# Altium PCB SOUL_EEG_PCB_Rev1.PcbDoc (part 1 of 2)
Units mil, origin at the board's own origin, x right, y up, seen from the top; angles counter-clockwise.
Board outline 3125 x 4300 mil, 4 copper layers (Top Layer, Upper Signal Layer, Lower Signal Layer, Bottom Layer), stack 30.635 mil thick; 183 components, 219 nets, 853 pads, 303 vias.
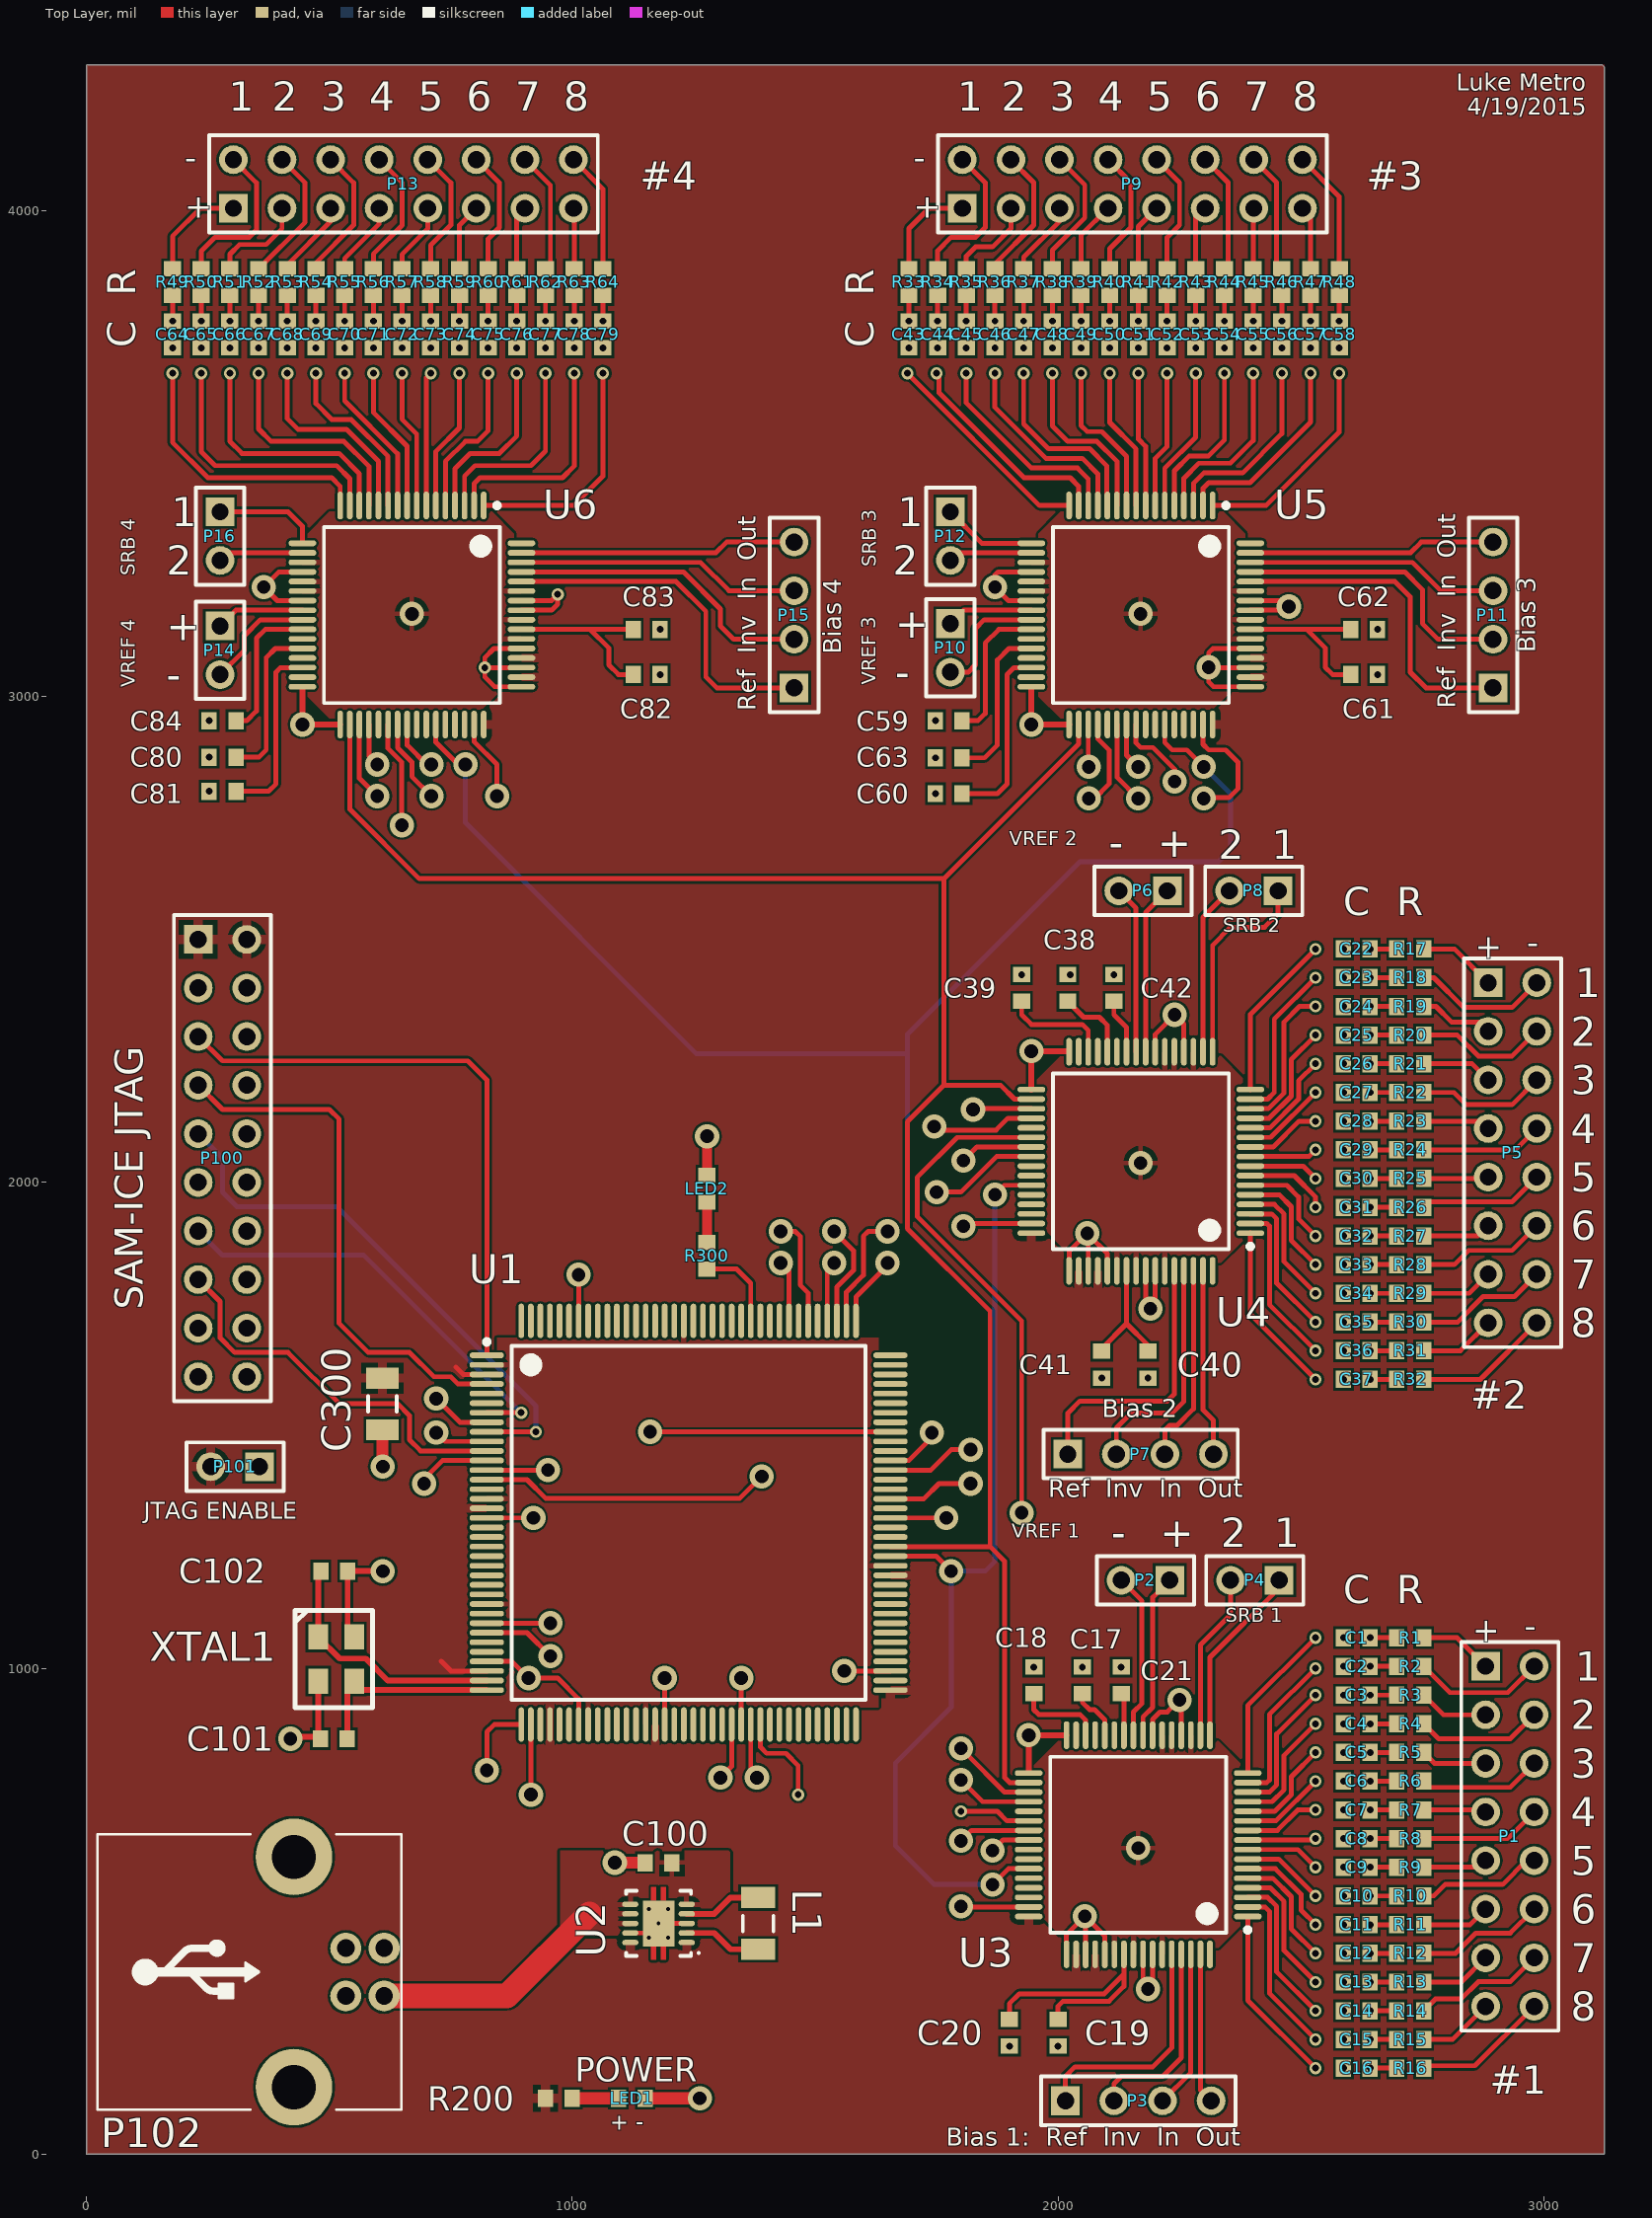
[diagram p0: Top Layer view]
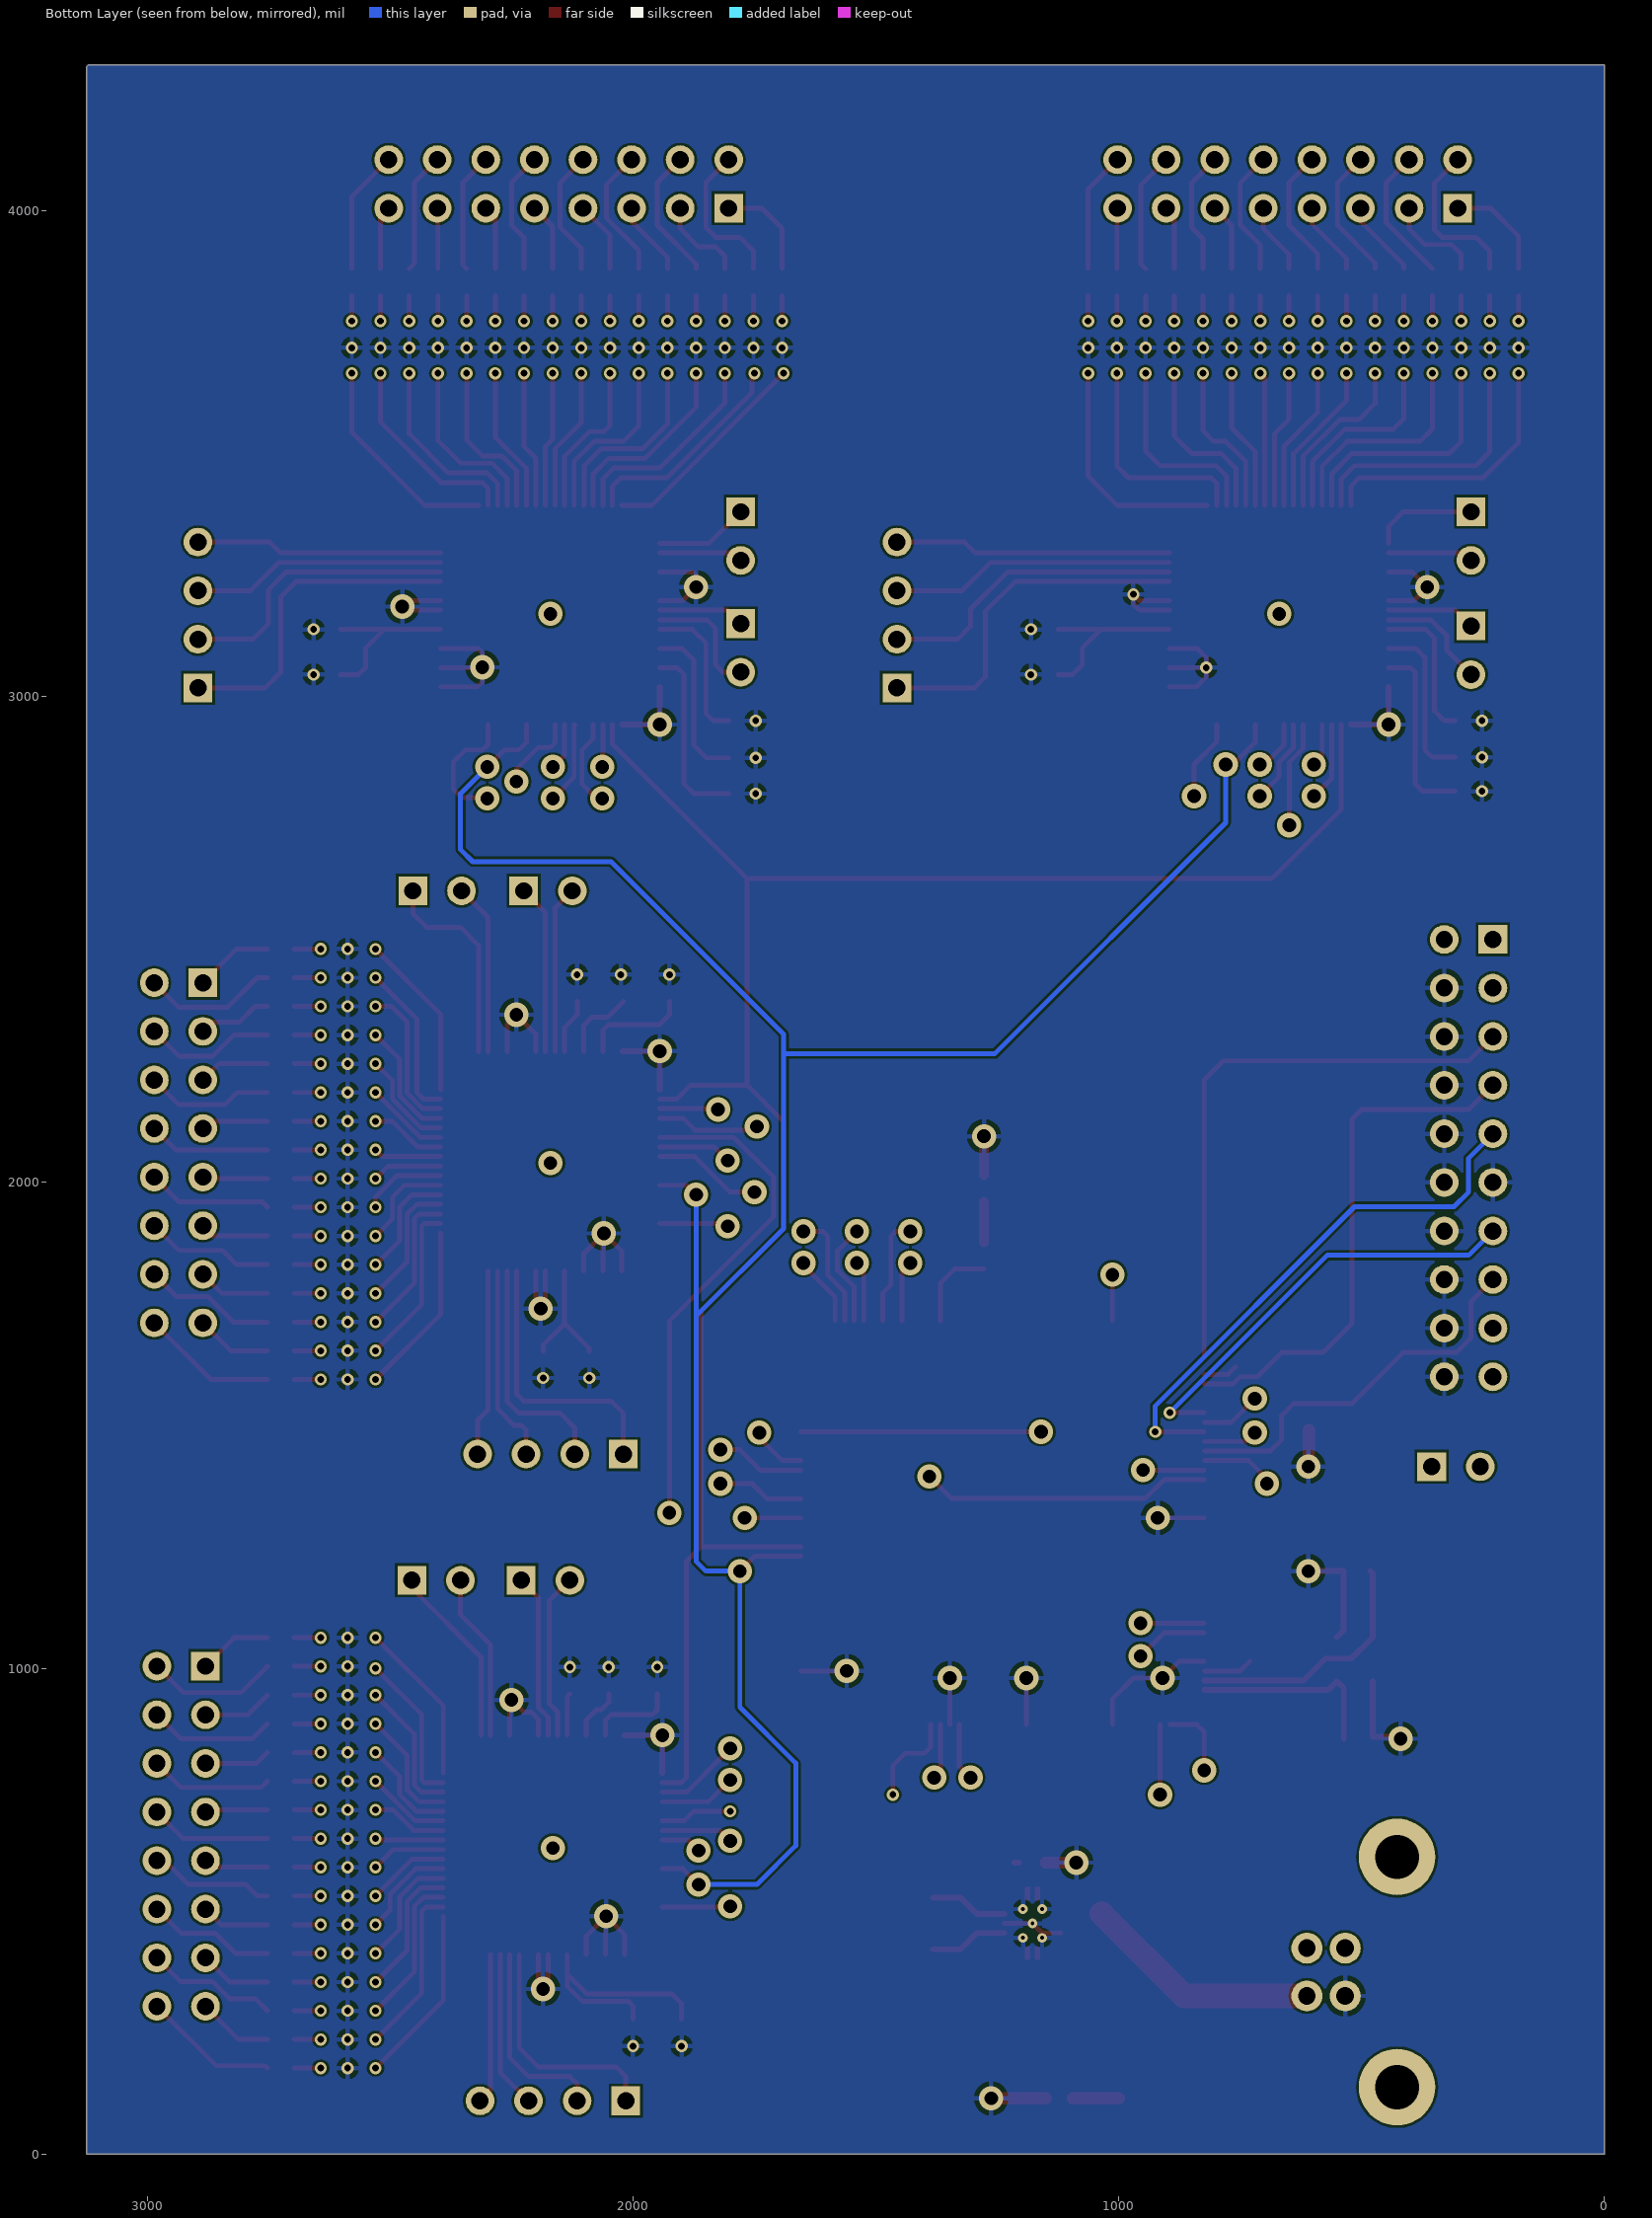
[diagram p1: Bottom Layer view, seen from below]
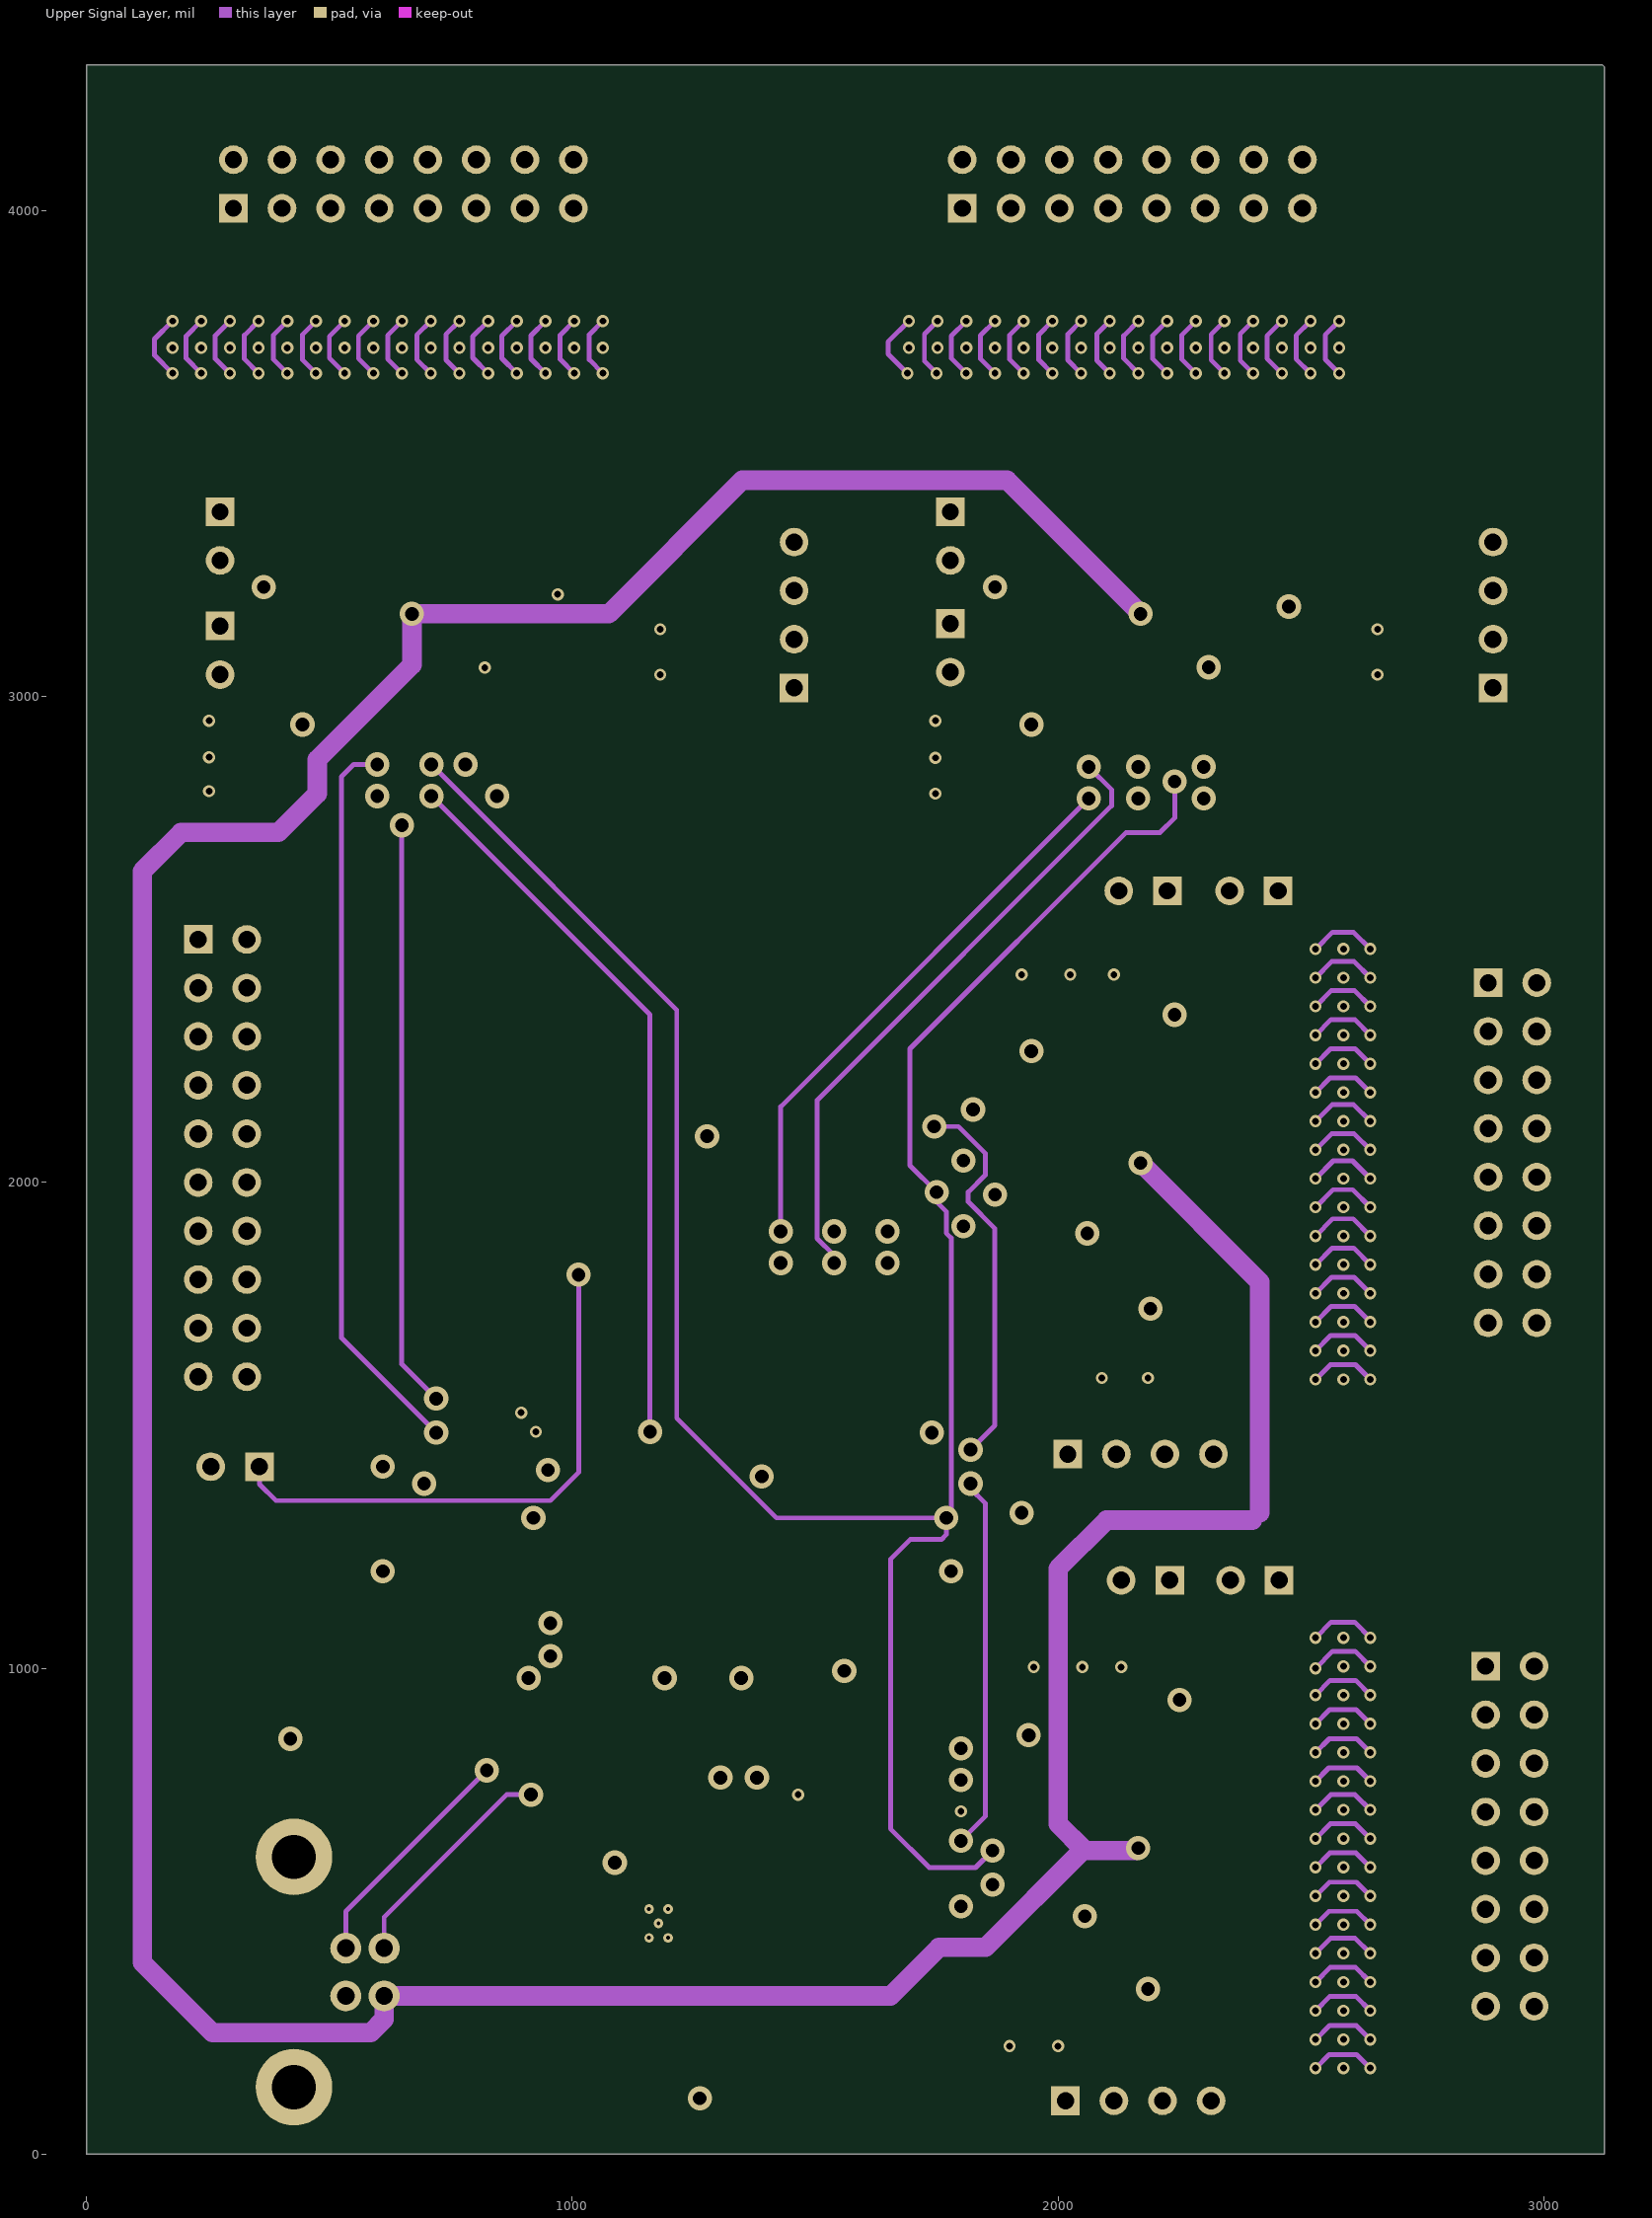
[diagram p2: Upper Signal Layer]
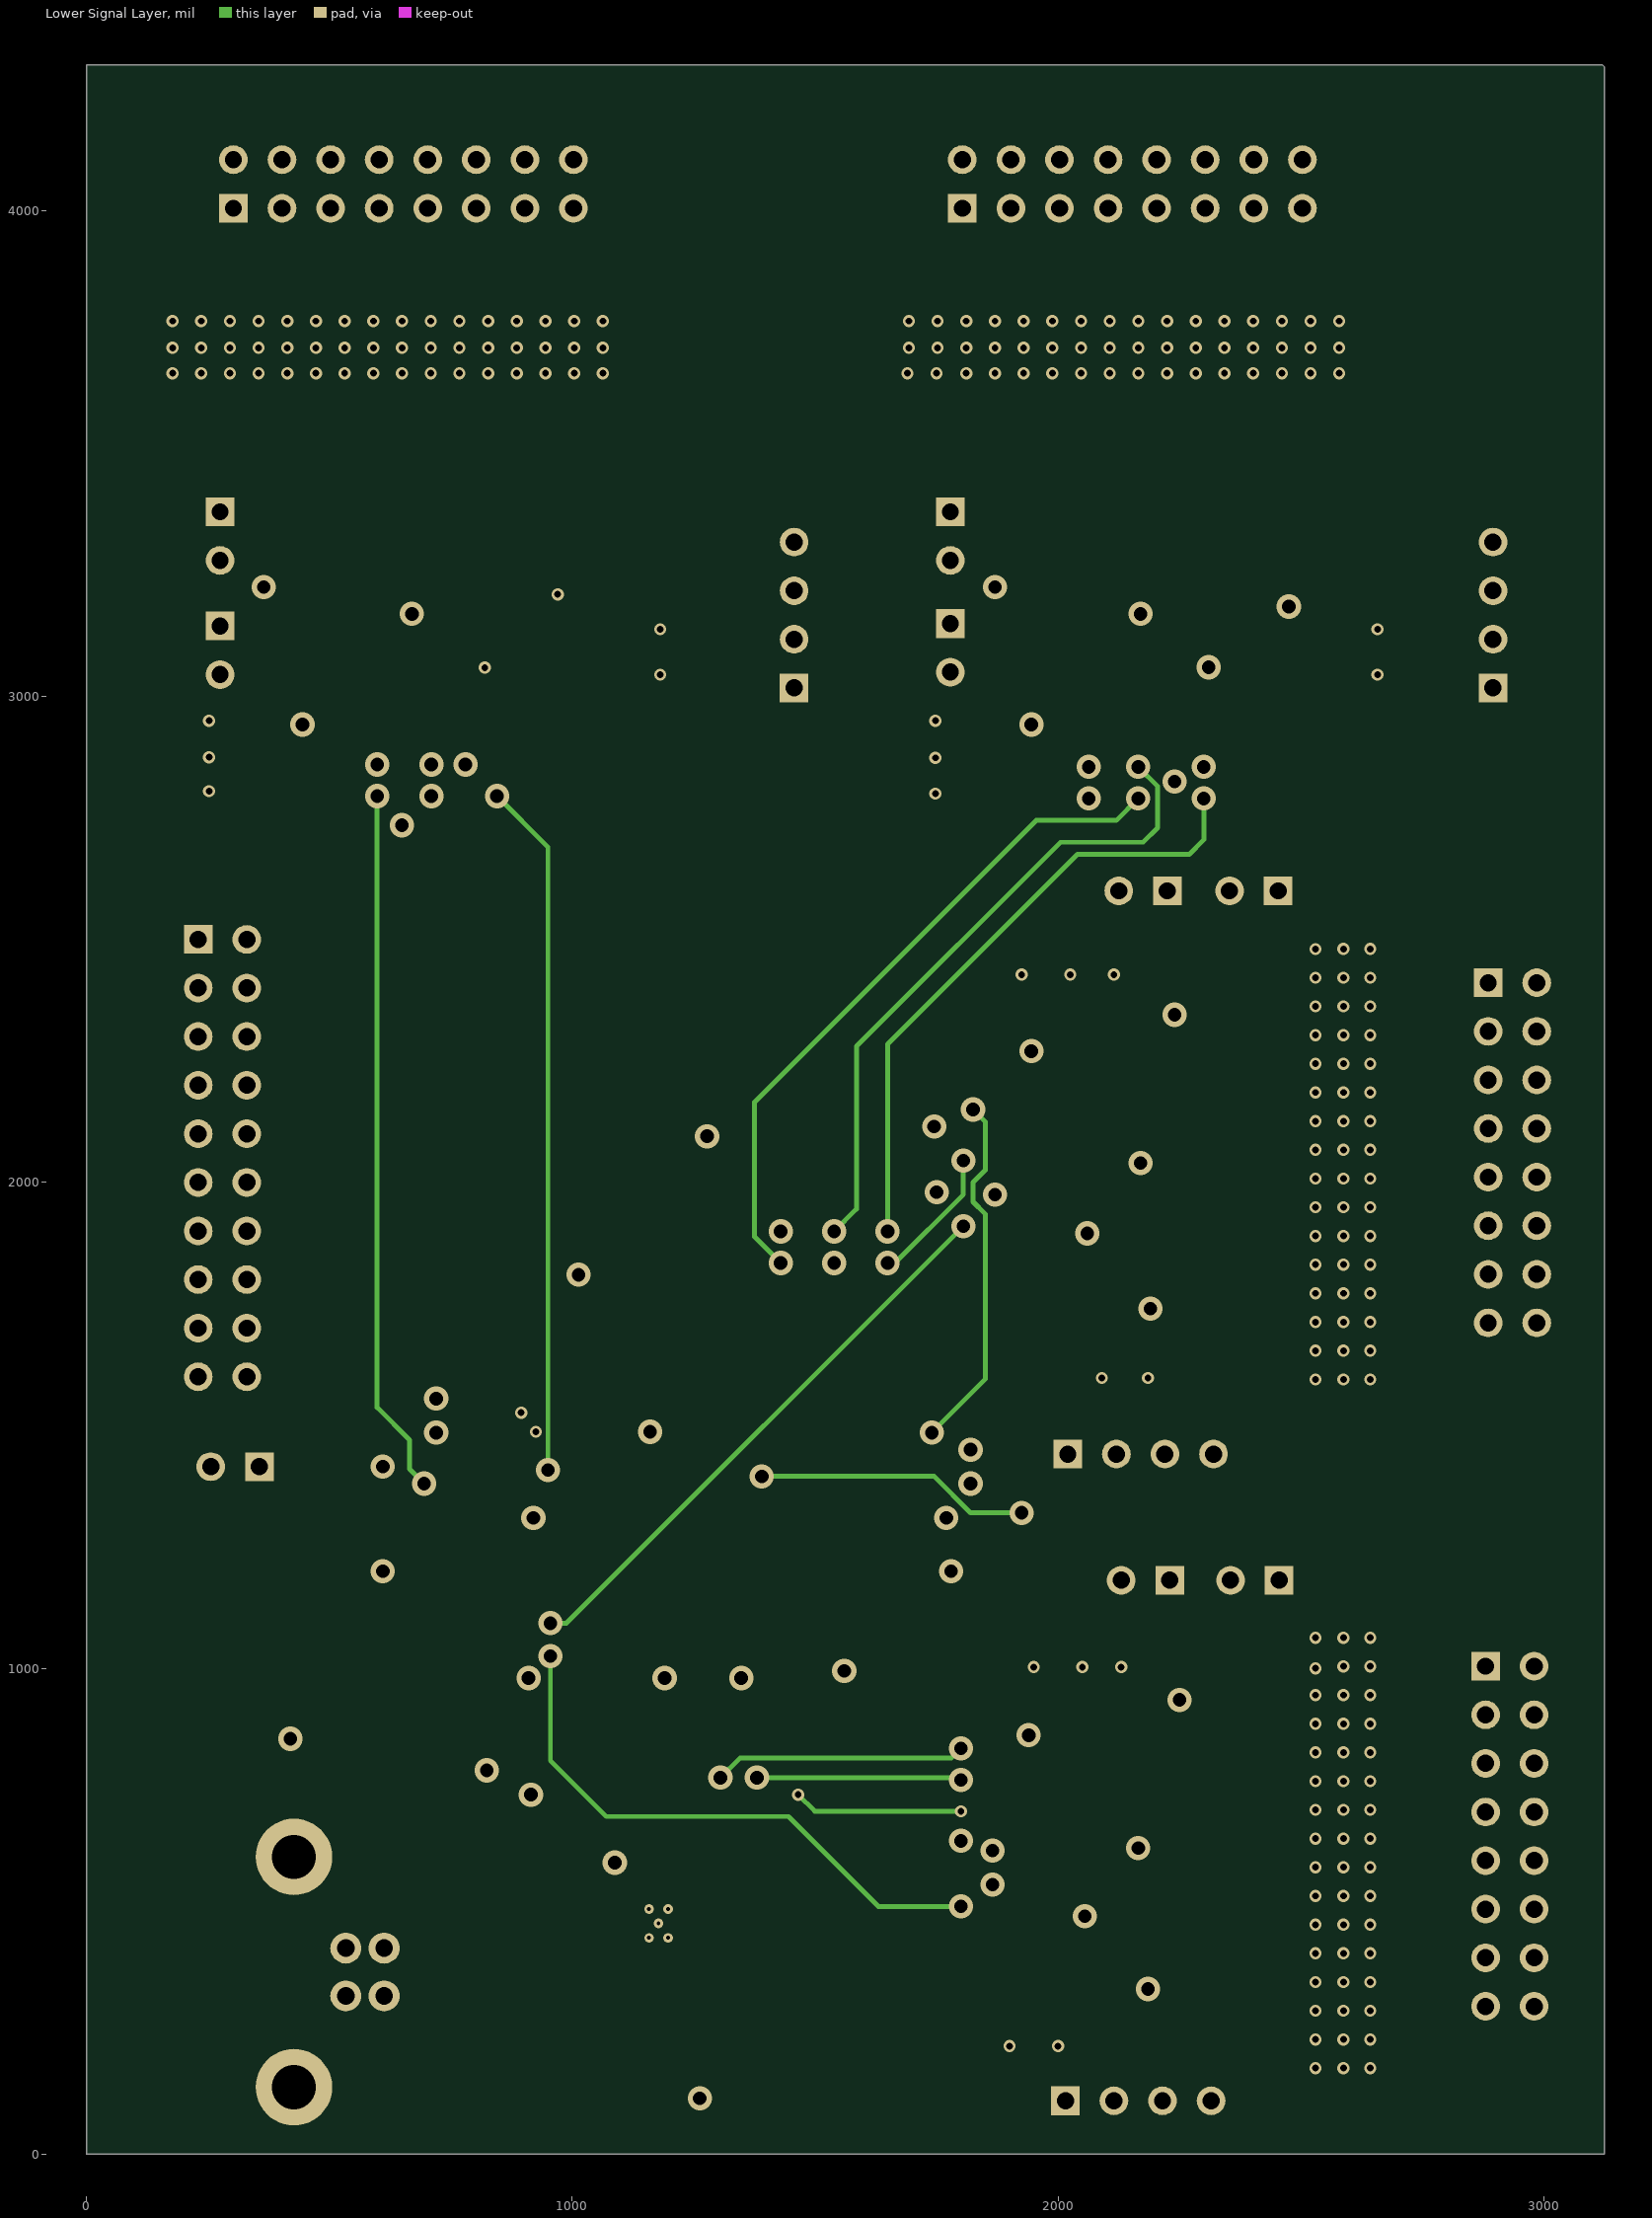
[diagram p3: Lower Signal Layer]

## Layer stack, top to bottom
Top Solder: solder mask 0.4, Solder Resist, Dk 3.5
Top Layer: signal copper 1.4
Dielectric 1: core 10, FR-4, Dk 4.2
Upper Signal Layer: signal copper 1.4173
Dielectric 3: prepreg 5, Dk 4.2
Lower Signal Layer: signal copper 1.4173
Dielectric 2: core 10, Dk 4.2
Bottom Layer: signal copper 1.4
Bottom Solder: solder mask 0.4, Solder Resist, Dk 3.5

## Board outline
0,0 3125,0 3125,4295 3120,4300 0,4300

## Design rules (kind name [scope] priority, off if disabled: settings)
Clearance [All] p1: gap=5
MinimumSolderMaskSliver [All vs InComponent('U2') = False] p1: minsoldermaskwidth=5
PlaneClearance [InComponent('U2') = False] p1: clearance=10
PolygonConnect PolygonConnect_2 [All vs IsNamedPolygon('3.3V Power Plane')] p1: connectstyle=Relief reliefconductorwidth=19.68 reliefentries=4 polygonreliefangle="90 Angle" airgapwidth=10
PolygonConnect PolygonConnect_1 [All vs IsNamedPolygon('Ground Plane')] p2: connectstyle=Relief reliefconductorwidth=19.68 reliefentries=4 polygonreliefangle="90 Angle" airgapwidth=10
PolygonConnect [All] p3: connectstyle=Relief reliefconductorwidth=10 reliefentries=4 polygonreliefangle="90 Angle" airgapwidth=10
RoomDefinition EEG_3 [InComponentClass('EEG_3')] p1: confinementstyle=ConfineIn formatcopy=TRUE lockcomponents=TRUE outline 1590,2760 3110,2760 3110,4294.12 1597.27,4294.12 1590,4305
RoomDefinition USB_Controller [InComponentClass('USB_Controller')] p2: confinementstyle=ConfineIn formatcopy=TRUE lockcomponents=FALSE outline 1542.56,701.85 17.56,701.85 17.56,-100 1542.56,-100
RoomDefinition Microcontroller [InComponentClass('Microcontroller')] p3: confinementstyle=ConfineIn formatcopy=TRUE lockcomponents=FALSE outline 404.13,829.65 1709.49,829.65 1709.49,2084.13 404.13,2084.13
RoomDefinition JTAG_Connector [InComponentClass('JTAG_Connector')] p4: confinementstyle=ConfineIn formatcopy=TRUE lockcomponents=FALSE outline 825,2675 25,2675 25,1250 825,1250
RoomDefinition EEG_4 [InComponentClass('EEG_4')] p5: confinementstyle=ConfineIn formatcopy=TRUE lockcomponents=FALSE outline 0,2765 1570,2765 1570,4300 0,4300
RoomDefinition EEG_2 [InComponentClass('EEG_2')] p6: confinementstyle=ConfineIn formatcopy=TRUE lockcomponents=FALSE outline 1890,1330 3110,1330 3110,2750 1890,2750
RoomDefinition EEG_1 [InComponentClass('EEG_1')] p7: confinementstyle=ConfineIn formatcopy=TRUE lockcomponents=FALSE outline 1875,0 3110,0 3110,1320 1875,1320
RoutingVias [All] p1: holewidth=28 width=50 viastyle="Through Hole" minholewidth=28 minwidth=50 maxholewidth=28 maxwidth=50
SilkToSilkClearance [All] p1: silktosilkclearance=5
SilkToSolderMaskClearance [IsPad vs InComponent('P102') = False] p1: minsilkscreentomaskgap=5 clearancetoexposedcopper=TRUE
SolderMaskExpansion [All] p1: expansion=4
UnpouredPolygon [All] p1: allowunpoured=FALSE
Width [All] p1: maxlimit=50 minlimit=10 preferedwidth=10
25 further rules are at their usual default settings.

## Classes and differential pairs
component class USB_Controller: C100 L1 LED1 P102 R200 U2
component class Microcontroller: C101 C102 C300 LED2 R300 U1 XTAL1
component class JTAG_Connector: P100 P101
component class EEG_4: C64 C65 C66 C67 C68 C69 C70 C71 C72 C73 C74 C75 C76 C77 C78 C79 C80 C81 C82 C83 C84 P13 P14 P15 P16 R49 R50 R51 R52 R53 R54 R55 R56 R57 R58 R59 R60 R61 R62 R63 R64 U6
component class EEG_3: C43 C44 C45 C46 C47 C48 C49 C50 C51 C52 C53 C54 C55 C56 C57 C58 C59 C60 C61 C62 C63 P9 P10 P11 P12 R33 R34 R35 R36 R37 R38 R39 R40 R41 R42 R43 R44 R45 R46 R47 R48 U5
component class EEG_2: C22 C23 C24 C25 C26 C27 C28 C29 C30 C31 C32 C33 C34 C35 C36 C37 C38 C39 C40 C41 C42 P5 P6 P7 P8 R17 R18 R19 R20 R21 R22 R23 R24 R25 R26 R27 R28 R29 R30 R31 R32 U4 "VREF 2: +   -"
component class EEG_1: C1 C2 C3 C4 C5 C6 C7 C8 C9 C10 C11 C12 C13 C14 C15 C16 C17 C18 C19 C20 C21 P1 P2 P3 P4 R1 R2 R3 R4 R5 R6 R7 R8 R9 R10 R11 R12 R13 R14 R15 R16 U3

## Components (designator, comment, footprint, x,y, rotation, side; value= is the part's Value field where it differs from the comment)
C1 "4.7nF" 1608[0603] 2615,1062.99 r0 top
C2 "4.7nF" 1608[0603] 2615,1003.94 r180 top
C3 "4.7nF" 1608[0603] 2615,944.88 r0 top
C4 "4.7nF" 1608[0603] 2615,885.83 r180 top
C5 "4.7nF" 1608[0603] 2615,826.77 r0 top
C6 "4.7nF" 1608[0603] 2615,767.72 r180 top
C7 "4.7nF" 1608[0603] 2615,708.66 r0 top
C8 "4.7nF" 1608[0603] 2615,649.61 r180 top
C9 "4.7nF" 1608[0603] 2615,590.55 r0 top
C10 "4.7nF" 1608[0603] 2615,531.5 r180 top
C11 "4.7nF" 1608[0603] 2615,472.44 r0 top
C12 "4.7nF" 1608[0603] 2615,413.39 r180 top
C13 "4.7nF" 1608[0603] 2615,354.33 r0 top
C14 "4.7nF" 1608[0603] 2615,295.28 r180 top
C15 "4.7nF" 1608[0603] 2615,236.22 r0 top
C16 "4.7nF" 1608[0603] 2615,177.17 r180 top
C17 "C1206" 1608[0603] 2050,975 r90 top
C18 "C1206" 1608[0603] 1950,975 r270 top
C19 "C1206" 1608[0603] 2000,250 r270 top
C20 "C1206" 1608[0603] 1900,250 r90 top
C21 "C1206" 1608[0603] 2130,975 r270 top
C22 "4.7nF" 1608[0603] 2615,2480.32 r0 top
C23 "4.7nF" 1608[0603] 2615,2421.26 r180 top
C24 "4.7nF" 1608[0603] 2615,2362.2 r0 top
C25 "4.7nF" 1608[0603] 2615,2303.15 r180 top
C26 "4.7nF" 1608[0603] 2615,2244.09 r0 top
C27 "4.7nF" 1608[0603] 2615,2185.04 r180 top
C28 "4.7nF" 1608[0603] 2615,2125.98 r0 top
C29 "4.7nF" 1608[0603] 2615,2066.93 r180 top
C30 "4.7nF" 1608[0603] 2615,2007.87 r0 top
C31 "4.7nF" 1608[0603] 2615,1948.82 r180 top
C32 "4.7nF" 1608[0603] 2615,1889.76 r0 top
C33 "4.7nF" 1608[0603] 2615,1830.71 r180 top
C34 "4.7nF" 1608[0603] 2615,1771.65 r0 top
C35 "4.7nF" 1608[0603] 2615,1712.6 r180 top
C36 "4.7nF" 1608[0603] 2615,1653.54 r0 top
C37 "4.7nF" 1608[0603] 2615,1594.49 r180 top
C38 "C1206" 1608[0603] 2020,2400 r90 top
C39 "C1206" 1608[0603] 1925,2400 r270 top
C40 "C1206" 1608[0603] 2185,1625 r270 top
C41 "C1206" 1608[0603] 2090,1625 r90 top
C42 "C1206" 1608[0603] 2115,2400 r270 top
C43 "4.7nF" 1608[0603] 1692.91,3745 r90 top
C44 "4.7nF" 1608[0603] 1751.97,3745 r270 top
C45 "4.7nF" 1608[0603] 1811.02,3745 r90 top
C46 "4.7nF" 1608[0603] 1870.08,3745 r270 top
C47 "4.7nF" 1608[0603] 1929.13,3745 r90 top
C48 "4.7nF" 1608[0603] 1988.19,3745 r270 top
C49 "4.7nF" 1608[0603] 2047.24,3745 r90 top
C50 "4.7nF" 1608[0603] 2106.3,3745 r270 top
C51 "4.7nF" 1608[0603] 2165.35,3745 r90 top
C52 "4.7nF" 1608[0603] 2224.41,3745 r270 top
C53 "4.7nF" 1608[0603] 2283.46,3745 r90 top
C54 "4.7nF" 1608[0603] 2342.52,3745 r270 top
C55 "4.7nF" 1608[0603] 2401.57,3745 r90 top
C56 "4.7nF" 1608[0603] 2460.63,3745 r270 top
C57 "4.7nF" 1608[0603] 2519.68,3745 r90 top
C58 "4.7nF" 1608[0603] 2578.74,3745 r270 top
C59 "C1206" 1608[0603] 1775,2873.74 r180 top
C60 "C1206" 1608[0603] 1775,2800 r0 top
C61 "C1206" 1608[0603] 2630,3045 r0 top
C62 "C1206" 1608[0603] 2630,3138.11 r180 top
C63 "C1206" 1608[0603] 1775,2950 r0 top
C64 "4.7nF" 1608[0603] 177.17,3745 r90 top
C65 "4.7nF" 1608[0603] 236.22,3745 r270 top
C66 "4.7nF" 1608[0603] 295.28,3745 r90 top
C67 "4.7nF" 1608[0603] 354.33,3745 r270 top
C68 "4.7nF" 1608[0603] 413.39,3745 r90 top
C69 "4.7nF" 1608[0603] 472.44,3745 r270 top
C70 "4.7nF" 1608[0603] 531.5,3745 r90 top
C71 "4.7nF" 1608[0603] 590.55,3745 r270 top
C72 "4.7nF" 1608[0603] 649.61,3745 r90 top
C73 "4.7nF" 1608[0603] 708.66,3745 r270 top
C74 "4.7nF" 1608[0603] 767.72,3745 r90 top
C75 "4.7nF" 1608[0603] 826.77,3745 r270 top
C76 "4.7nF" 1608[0603] 885.83,3745 r90 top
C77 "4.7nF" 1608[0603] 944.88,3745 r270 top
C78 "4.7nF" 1608[0603] 1003.94,3745 r90 top
C79 "4.7nF" 1608[0603] 1062.99,3745 r270 top
C80 "C1206" 1608[0603] 280,2875 r180 top
C81 "C1206" 1608[0603] 280,2805 r0 top
C82 "C1206" 1608[0603] 1153.32,3045 r0 top
C83 "C1206" 1608[0603] 1153.32,3138.11 r180 top
C84 "C1206" 1608[0603] 280,2950 r0 top
C100 "Cap Semi" 1608[0603] 1177.56,600 r0 top
C101 "Cap Semi" 1608[0603] 509.13,855 r0 top
C102 "Cap Semi" 1608[0603] 510,1200 r0 top
C300 "Cap Semi" C1206 609.13,1544.13 r270 top
L1 "Inductor" INDC3216 1382.56,475 r270 top
LED1 "GREEN" 1608[0603] 1122.56,115 r0 top
LED2 "GREEN" 1608[0603] 1277.44,1987.32 r90 top
P1 "Header 8X2" HDR2X8 2880,1004.34 r270 top
P2 "Header 2" HDR1X2 2230,1181.1 r180 top
P3 "Header 4" HDR1X4 2015,110 r0 top
P4 "Header 2" HDR1X2 2455,1181.1 r180 top
P5 "Header 8X2" HDR2X8 2885.39,2410.83 r270 top
P6 "Header 2" HDR1X2 2225,2600 r180 top
P7 "Header 4" HDR1X4 2020,1440.94 r0 top
P8 "Header 2" HDR1X2 2452.88,2600 r180 top
P9 "Header 8X2" HDR2X8 1802.91,4004.65 r0 top
P10 "Header 2" HDR1X2 1778.32,3150 r270 top
P11 "Header 4" HDR1X4 2895.39,3017.64 r90 top
P12 "Header 2" HDR1X2 1778.31,3380 r270 top
P13 "Header 8X2" HDR2X8 302.51,4004.65 r0 top
P14 "Header 2" HDR1X2 275,3145 r270 top
P15 "Header 4" HDR1X4 1456.69,3017.64 r90 top
P16 "Header 2" HDR1X2 275,3380 r270 top
P100 "Header 10X2" HDR2X10 230,2500 r270 top
P101 "Header 2" HDR1X2 355.91,1415 r180 top
P102 "USB-B" USB_TypeB_Tyco 22.56,375 r0 top
R1 "4.99K" 1608[0603] 2725,1062.99 r0 top
R2 "4.99K" 1608[0603] 2725,1003.94 r0 top
R3 "4.99K" 1608[0603] 2725,944.88 r0 top
R4 "4.99K" 1608[0603] 2725,885.83 r0 top
R5 "4.99K" 1608[0603] 2725,826.77 r0 top
R6 "4.99K" 1608[0603] 2725,767.72 r0 top
R7 "4.99K" 1608[0603] 2725,708.66 r0 top
R8 "4.99K" 1608[0603] 2725,649.61 r0 top
R9 "4.99K" 1608[0603] 2725,590.55 r0 top
R10 "4.99K" 1608[0603] 2725,531.5 r0 top
R11 "4.99K" 1608[0603] 2725,472.44 r0 top
R12 "4.99K" 1608[0603] 2725,413.39 r0 top
R13 "4.99K" 1608[0603] 2725,354.33 r0 top
R14 "4.99K" 1608[0603] 2725,295.28 r0 top
R15 "4.99K" 1608[0603] 2725,236.22 r0 top
R16 "4.99K" 1608[0603] 2725,177.17 r0 top
R17 "4.99K" 1608[0603] 2725,2480.32 r0 top
R18 "4.99K" 1608[0603] 2725,2421.26 r0 top
R19 "4.99K" 1608[0603] 2725,2362.2 r0 top
R20 "4.99K" 1608[0603] 2725,2303.15 r0 top
R21 "4.99K" 1608[0603] 2725,2244.09 r0 top
R22 "4.99K" 1608[0603] 2725,2185.04 r0 top
R23 "4.99K" 1608[0603] 2725,2125.98 r0 top
R24 "4.99K" 1608[0603] 2725,2066.93 r0 top
R25 "4.99K" 1608[0603] 2725,2007.87 r0 top
R26 "4.99K" 1608[0603] 2725,1948.82 r0 top
R27 "4.99K" 1608[0603] 2725,1889.76 r0 top
R28 "4.99K" 1608[0603] 2725,1830.71 r0 top
R29 "4.99K" 1608[0603] 2725,1771.65 r0 top
R30 "4.99K" 1608[0603] 2725,1712.6 r0 top
R31 "4.99K" 1608[0603] 2725,1653.54 r0 top
R32 "4.99K" 1608[0603] 2725,1594.49 r0 top
R33 "4.99K" 1608[0603] 1692.91,3852.64 r90 top
R34 "4.99K" 1608[0603] 1751.97,3852.64 r90 top
R35 "4.99K" 1608[0603] 1811.02,3852.64 r90 top
R36 "4.99K" 1608[0603] 1870.08,3852.64 r90 top
R37 "4.99K" 1608[0603] 1929.13,3852.64 r90 top
R38 "4.99K" 1608[0603] 1988.19,3852.64 r90 top
R39 "4.99K" 1608[0603] 2047.24,3852.64 r90 top
R40 "4.99K" 1608[0603] 2106.3,3852.64 r90 top
R41 "4.99K" 1608[0603] 2165.35,3852.64 r90 top
R42 "4.99K" 1608[0603] 2224.41,3852.64 r90 top
R43 "4.99K" 1608[0603] 2283.46,3852.64 r90 top
R44 "4.99K" 1608[0603] 2342.52,3852.64 r90 top
R45 "4.99K" 1608[0603] 2401.57,3852.64 r90 top
R46 "4.99K" 1608[0603] 2460.63,3852.64 r90 top
R47 "4.99K" 1608[0603] 2519.68,3852.64 r90 top
R48 "4.99K" 1608[0603] 2578.74,3852.64 r90 top
R49 "4.99K" 1608[0603] 177.17,3852.64 r90 top
R50 "4.99K" 1608[0603] 236.22,3852.64 r90 top
R51 "4.99K" 1608[0603] 295.28,3852.64 r90 top
R52 "4.99K" 1608[0603] 354.33,3852.64 r90 top
R53 "4.99K" 1608[0603] 413.39,3852.64 r90 top
R54 "4.99K" 1608[0603] 472.44,3852.64 r90 top
R55 "4.99K" 1608[0603] 531.5,3852.64 r90 top
R56 "4.99K" 1608[0603] 590.55,3852.64 r90 top
R57 "4.99K" 1608[0603] 649.61,3852.64 r90 top
R58 "4.99K" 1608[0603] 708.66,3852.64 r90 top
R59 "4.99K" 1608[0603] 767.72,3852.64 r90 top
R60 "4.99K" 1608[0603] 826.77,3852.64 r90 top
R61 "4.99K" 1608[0603] 885.83,3852.64 r90 top
R62 "4.99K" 1608[0603] 944.88,3852.64 r90 top
R63 "4.99K" 1608[0603] 1003.94,3852.64 r90 top
R64 "4.99K" 1608[0603] 1062.99,3852.64 r90 top
R200 "Res3" 1608[0603] 972.56,115 r0 top
R300 "Res3" 1608[0603] 1277.44,1849.13 r90 top
U1 "ATSAM3U4EA-AU" 144L1_N 1239.49,1299.65 r0 top
U2 "TPS63001DRCR" DRC10-2400X1650TP 1177.56,475 r180 top (schematic designator U2-3.3)
U3 "ADS1299" "ADS1299 Plastic QFP" 2165,636.85 r180 top
U4 "ADS1299" "ADS1299 Plastic QFP" 2170.39,2043.35 r180 top
U5 "ADS1299" "ADS1299 Plastic QFP" 2170.39,3167.64 r270 top
U6 "ADS1299" "ADS1299 Plastic QFP" 670,3167.64 r270 top
XTAL1 "ABM8 Crystal 4-SMD XTAL" "ABM8 Crystal XTAL" 514.13,1018.9 r270 top

## Footprints (in the part's own frame and the unit in brackets; to place one, negate y for a bottom-side part, rotate by r counter-clockwise, add the part's x,y. Pads: shape width x height; smd on the part's side, far side on the other; paste and mask are expansions set on the pad)
144L1_N [mm] "Thin QFP, 144-Leads, Body 20x20mm, Pitch 0.5mm, IPC Medium Density"
  oval 1.8x0.3 smd: 1(-10.55,8.75) 2(-10.55,8.25) 3(-10.55,7.75) 4(-10.55,7.25) 5(-10.55,6.75) 6(-10.55,6.25) 7(-10.55,5.75) 8(-10.55,5.25) 9(-10.55,4.75) 10(-10.55,4.25) 11(-10.55,3.75) 12(-10.55,3.25) 13(-10.55,2.75) 14(-10.55,2.25) 15(-10.55,1.75) 16(-10.55,1.25) 17(-10.55,0.75) 18(-10.55,0.25) 19(-10.55,-0.25) 20(-10.55,-0.75) 21(-10.55,-1.25) 22(-10.55,-1.75) 23(-10.55,-2.25) 24(-10.55,-2.75) 25(-10.55,-3.25) 26(-10.55,-3.75) 27(-10.55,-4.25) 28(-10.55,-4.75) 29(-10.55,-5.25) 30(-10.55,-5.75) 31(-10.55,-6.25) 32(-10.55,-6.75) 33(-10.55,-7.25) 34(-10.55,-7.75) 35(-10.55,-8.25) 36(-10.55,-8.75) 73(10.55,-8.75) 74(10.55,-8.25) 75(10.55,-7.75) 76(10.55,-7.25) 77(10.55,-6.75) 78(10.55,-6.25) 79(10.55,-5.75) 80(10.55,-5.25) 81(10.55,-4.75) 82(10.55,-4.25) 83(10.55,-3.75) 84(10.55,-3.25) 85(10.55,-2.75) 86(10.55,-2.25) 87(10.55,-1.75) 88(10.55,-1.25) 89(10.55,-0.75) 90(10.55,-0.25) 91(10.55,0.25) 92(10.55,0.75) 93(10.55,1.25) 94(10.55,1.75) 95(10.55,2.25) 96(10.55,2.75) 97(10.55,3.25) 98(10.55,3.75) 99(10.55,4.25) 100(10.55,4.75) 101(10.55,5.25) 102(10.55,5.75) 103(10.55,6.25) 104(10.55,6.75) 105(10.55,7.25) 106(10.55,7.75) 107(10.55,8.25) 108(10.55,8.75)
  oval 0.3x1.8 smd: 37(-8.75,-10.55) 38(-8.25,-10.55) 39(-7.75,-10.55) 40(-7.25,-10.55) 41(-6.75,-10.55) 42(-6.25,-10.55) 43(-5.75,-10.55) 44(-5.25,-10.55) 45(-4.75,-10.55) 46(-4.25,-10.55) 47(-3.75,-10.55) 48(-3.25,-10.55) 49(-2.75,-10.55) 50(-2.25,-10.55) 51(-1.75,-10.55) 52(-1.25,-10.55) 53(-0.75,-10.55) 54(-0.25,-10.55) 55(0.25,-10.55) 56(0.75,-10.55) 57(1.25,-10.55) 58(1.75,-10.55) 59(2.25,-10.55) 60(2.75,-10.55) 61(3.25,-10.55) 62(3.75,-10.55) 63(4.25,-10.55) 64(4.75,-10.55) 65(5.25,-10.55) 66(5.75,-10.55) 67(6.25,-10.55) 68(6.75,-10.55) 69(7.25,-10.55) 70(7.75,-10.55) 71(8.25,-10.55) 72(8.75,-10.55) 109(8.75,10.55) 110(8.25,10.55) 111(7.75,10.55) 112(7.25,10.55) 113(6.75,10.55) 114(6.25,10.55) 115(5.75,10.55) 116(5.25,10.55) 117(4.75,10.55) 118(4.25,10.55) 119(3.75,10.55) 120(3.25,10.55) 121(2.75,10.55) 122(2.25,10.55) 123(1.75,10.55) 124(1.25,10.55) 125(0.75,10.55) 126(0.25,10.55) 127(-0.25,10.55) 128(-0.75,10.55) 129(-1.25,10.55) 130(-1.75,10.55) 131(-2.25,10.55) 132(-2.75,10.55) 133(-3.25,10.55) 134(-3.75,10.55) 135(-4.25,10.55) 136(-4.75,10.55) 137(-5.25,10.55) 138(-5.75,10.55) 139(-6.25,10.55) 140(-6.75,10.55) 141(-7.25,10.55) 142(-7.75,10.55) 143(-8.25,10.55) 144(-8.75,10.55)
  silkscreen extent -10.67,-9.25 9.25,9.57, body extent -10,-10 10,10, height 1.6
1608[0603] [mm] "Chip Capacitor, Body 1.6x0.8mm, IPC High Density"
  rect 0.8x0.9 smd: 1(-0.7,0) 2(0.7,0)
  body extent -0.87,-0.48 0.87,0.48, height 1.3
"ABM8 Crystal XTAL" [mil] "SMD Crystal XTAL"
  rect 52x41 smd: 1(-45.5,-37) 2(45.5,-37) 3(45.5,37) 4(-45.5,37)
  silkscreen extent -100,-85 100,75
"ADS1299 Plastic QFP" [mm] "TSQFP, 64-Leads, Body 10.00x10.00mm, Pitch 0.50mm, IPC Medium Density"
  oval 1.45x0.3 smd: 1(-5.725,3.75) 2(-5.725,3.25) 3(-5.725,2.75) 4(-5.725,2.25) 5(-5.725,1.75) 6(-5.725,1.25) 7(-5.725,0.75) 8(-5.725,0.25) 9(-5.725,-0.25) 10(-5.725,-0.75) 11(-5.725,-1.25) 12(-5.725,-1.75) 13(-5.725,-2.25) 14(-5.725,-2.75) 15(-5.725,-3.25) 16(-5.725,-3.75) 33(5.725,-3.75) 34(5.725,-3.25) 35(5.725,-2.75) 36(5.725,-2.25) 37(5.725,-1.75) 38(5.725,-1.25) 39(5.725,-0.75) 40(5.725,-0.25) 41(5.725,0.25) 42(5.725,0.75) 43(5.725,1.25) 44(5.725,1.75) 45(5.725,2.25) 46(5.725,2.75) 47(5.725,3.25) 48(5.725,3.75)
  oval 0.3x1.45 smd: 17(-3.75,-5.725) 18(-3.25,-5.725) 19(-2.75,-5.725) 20(-2.25,-5.725) 21(-1.75,-5.725) 22(-1.25,-5.725) 23(-0.75,-5.725) 24(-0.25,-5.725) 25(0.25,-5.725) 26(0.75,-5.725) 27(1.25,-5.725) 28(1.75,-5.725) 29(2.25,-5.725) 30(2.75,-5.725) 31(3.25,-5.725) 32(3.75,-5.725) 49(3.75,5.725) 50(3.25,5.725) 51(2.75,5.725) 52(2.25,5.725) 53(1.75,5.725) 54(1.25,5.725) 55(0.75,5.725) 56(0.25,5.725) 57(-0.25,5.725) 58(-0.75,5.725) 59(-1.25,5.725) 60(-1.75,5.725) 61(-2.25,5.725) 62(-2.75,5.725) 63(-3.25,5.725) 64(-3.75,5.725)
  silkscreen extent -5.85,-4.6 4.6,4.6, body extent -5,-5 5,5, height 1.2
C1206 [mm] "Chip Capacitor, Body 3.2x1.6mm, IPC High Density"
  rect 1.1x1.7 smd: 1(-1.35,0) 2(1.35,0)
  silkscreen extent -0.4,-0.75 0.4,0.75, body extent -1.7,-0.9 1.7,0.9, height 1.3
DRC10-2400X1650TP [mm] "SON, 10-Leads, Body 3x3mm, Pitch 0.5mm, Thermal Pad 2.4x1.65mm, TI Recommended"
  oval 0.85x0.28 smd paste-0.025 mask+0.07: 1(-1.475,1) 2(-1.475,0.5) 3(-1.475,0) 4(-1.475,-0.5) 5(-1.475,-1) 6(1.475,-1) 7(1.475,-0.5) 8(1.475,0) 9(1.475,0.5) 10(1.475,1)
  rect 1.65x2.4 smd paste-0.825 mask+0.07: 11(0,0)
  Top Layer region: -0.39,1.2 -0.11,1.2 -0.11,1.9 -0.39,1.9
  Top Layer region: 0.39,1.9 0.11,1.9 0.11,1.2 0.39,1.2
  Top Layer region: 0.39,-1.2 0.11,-1.2 0.11,-1.9 0.39,-1.9
  Top Layer region: -0.39,-1.9 -0.11,-1.9 -0.11,-1.2 -0.39,-1.2
  silkscreen extent -2.15,-1.7 1.7,1.7, body extent -1.55,-1.55 1.55,1.55, height 1
HDR1X2 [mm] "Connector; Header; 2 Position"
  rect 1.5x1.5 hole 0.9: 1(0,0)
  round 1.5 hole 0.9: 2(2.54,0)
  silkscreen extent -1.27,-1.27 3.81,1.27
HDR1X4 [mm] "Connector; Header; 4 Position"
  rect 1.5x1.5 hole 0.9: 1(0,0)
  round 1.5 hole 0.9: 2(2.54,0) 3(5.08,0) 4(7.62,0)
  silkscreen extent -1.27,-1.27 8.89,1.27
HDR2X8 [mm] "Connector; Header; 8x2 Position"
  rect 1.5x1.5 hole 0.9: 1(0,0)
  round 1.5 hole 0.9: 2(0,2.54) 3(2.54,0) 4(2.54,2.54) 5(5.08,0) 6(5.08,2.54) 7(7.62,0) 8(7.62,2.54) 9(10.16,0) 10(10.16,2.54) 11(12.7,0) 12(12.7,2.54) 13(15.24,0) 14(15.24,2.54) 15(17.78,0) 16(17.78,2.54)
  silkscreen extent -1.27,-1.27 19.05,3.81
HDR2X10 [mm] "Connector; Header; 10x2 Position"
  rect 1.5x1.5 hole 0.9: 1(0,0)
  round 1.5 hole 0.9: 2(0,2.54) 3(2.54,0) 4(2.54,2.54) 5(5.08,0) 6(5.08,2.54) 7(7.62,0) 8(7.62,2.54) 9(10.16,0) 10(10.16,2.54) 11(12.7,0) 12(12.7,2.54) 13(15.24,0) 14(15.24,2.54) 15(17.78,0) 16(17.78,2.54) 17(20.32,0) 18(20.32,2.54) 19(22.86,0) 20(22.86,2.54)
  silkscreen extent -1.27,-1.27 24.13,3.81
INDC3216 [mm] "Chip Inductor, Body 3.2x1.6mm, IPC High Density"
  rect 1.1x1.8 smd: 1(-1.35,0) 2(1.35,0)
  silkscreen extent -0.4,-0.8 0.4,0.8, body extent -1.7,-0.9 1.7,0.9, height 0.55
USB_TypeB_Tyco [mm]
  round 1.626 hole 0.914: 1(14.99,-1.25) 2(14.99,1.25) 3(12.99,1.25) 4(12.99,-1.25)
  round 4 hole 2.3: MH(10.28,-6.02) MH(10.28,6.02)
  silkscreen extent 0,-7.2 15.9,7.2, body extent 0,-7.19 15.7,7.19, height 11.5

## Part data
C1 C2 C3 C4 C5 C6 C7 C8 C9 C10 C11 C12 C13 C14 C15 C16 C17 C18 C19 C20 C21 C22 C23 C24 C25 C26 C27 C28 C29 C30 C31 C32 C33 C34 C35 C36 C37 C38 C39 C40 C41 C42 C43 C44 C45 C46 C47 C48 C49 C50 C51 C52 C53 C54 C55 C56 C57 C58 C59 C60 C61 C62 C63 C64 C65 C66 C67 C68 C69 C70 C71 C72 C73 C74 C75 C76 C77 C78 C79 C80 C81 C82 C83 C84: library part "Cap Semi", "Capacitor (Semiconductor SIM Model)"
C100 C101 C102 C300: "Capacitor (Semiconductor SIM Model)"
LED1 LED2: library part LED0, "led"
P1 P5 P9 P13: "Header, 8-Pin, Dual row"
P2 P4 P6 P8 P10 P12 P14 P16 P101: "Header, 2-Pin"
P3 P7 P11 P15: "Header, 4-Pin"
P100: "Header, 10-Pin, Dual row"
P102: library part USB_TypeB, "Connector THT Type B USB connector"
R1 R2 R3 R4 R5 R6 R7 R8 R9 R10 R11 R12 R13 R14 R15 R16 R17 R18 R19 R20 R21 R22 R23 R24 R25 R26 R27 R28 R29 R30 R31 R32 R33 R34 R35 R36 R37 R38 R39 R40 R41 R42 R43 R44 R45 R46 R47 R48 R49 R50 R51 R52 R53 R54 R55 R56 R57 R58 R59 R60 R61 R62 R63 R64: library part Res3, "Resistor"
R200 R300: "Resistor"
U1: "AT91 ARM Cortex-M3 32-bit Microcontroller, 2x128KB Flash, 52KB SRAM, 96 User I/Os, 4USARTs, 144-Pin LQFP, Industrial Grade (-40°C to 85°C), Pb-Free"
U2: "Buck-Boost Voltage Converter with 1.8 to 5.5 V Input and 3.3 V Output, -40 to 85 degC, 10-Pin SON (DRC), Green (RoHS & no Sb/Br)"
XTAL1: library part "ABM8 Crystal 4-SMD XTAL_1", "SMD Crystal"

## Via types
v1: diameter 25, hole 14, Top Layer to Bottom Layer, 218 vias
v2: diameter 50, hole 28, Top Layer to Bottom Layer, 80 vias
v3: diameter 19.68, hole 7.87, Top Layer to Bottom Layer, 5 vias

## Nets (pads, with @x,y where several pads share a name; then routed paths per layer and width w, separated by ;. In a path a pad name is that pad's centre, name@x,y a point inside that pad or via, vN(x,y) a via of type N, cw(c..) or ccw(c..) an arc to the next point about the centre after c; other vN are vias at no path point)
1.8V: U1.2 U1.16 U1.27 U1.44 U1.50 U1.86 U1.127
3.3V: C300.1 P100.1 P100.2 P101.2 R200.1 U1.3 U1.17 U1.34 U1.40 U1.51 U1.73 U1.85 U2.1 U2.10 U3.48 U3.50 U3.52 U4.48 U4.50 U4.52 U5.48 U5.50 U5.52 U6.48 U6.50 U6.52 | length 173.1
  Top Layer w10: 730,1015 750.47,994.53 U1.34@824.13,994.53 ; 760,1620 775.24,1604.76 U1.3@824.13,1604.76
5V: C100.2 P102.1 U2.5 U2.6 U2.7 U2.8 U3.19 U3.21 U3.22 U3.54 U3.56 U3.59 U4.19 U4.21 U4.22 U4.54 U4.56 U4.59 U5.19 U5.21 U5.22 U5.54 U5.56 U5.59 U6.19 U6.21 U6.22 U6.54 U6.56 U6.59 | length 9539.6
  Top Layer w12: C100.2@1205.12,600 C100.2@1215,600
  Top Layer w50: P102.1@612.72,325.79 865.79,325.79 1035,495
  Upper Signal Layer w35: v2@2155,630 v2(2165,630) ; 2400,1305 2415,1320
  Upper Signal Layer w40: 2050,625 1850.79,425.79 1755,425.79 1655,325.79 P102.1@612.72,325.79 612.72,277.72 585,250 260,250 115,395 115,2640 195,2720 395,2720 475,2800 475,2870 670,3065 v2(670,3170) 1075,3170 1350,3445 1895,3445 v2(2170,3170) ; v2(2165,630) 2160,625 2055,625 2000,680 2000,1205 2100,1305 2400,1305 ; v2(2170,2040) 2415,1795 2415,1320
C_IN1N_1: P1.2 R2.2 | length 272.3
  Top Layer w10: R2.2@2752.56,1003.94 2806.5,950 2925.66,950 P1.2@2980,1004.34
C_IN1N_2: P5.2 R18.2 | length 279.3
  Top Layer w10: R18.2@2752.56,2421.26 2773.74,2421.26 2835,2360 2934.56,2360 P5.2@2985.39,2410.83
C_IN1N_3: P9.2 R34.2 | length 313.9
  Top Layer w10: R34.2@1751.97,3880.2 1751.97,3916.97 1780,3945 1830,3945 1850,3965 1850,4057.55 P9.2@1802.91,4104.65
C_IN1N_4: P13.2 R50.2 | length 332.3
  Top Layer w10: R50.2@236.22,3880.2 236.22,3916.22 265,3945 335,3945 350,3960 350,4057.16 P13.2@302.51,4104.65
C_IN1P_1: P1.1 R1.2 | length 151.7
  Top Layer w10: R1.2@2752.56,1062.99 2821.35,1062.99 P1.1@2880,1004.34
C_IN1P_2: P5.1 R17.2 | length 161.6
  Top Layer w10: R17.2@2752.56,2480.32 2815.91,2480.32 P5.1@2885.39,2410.83
C_IN1P_3: P9.1 R33.2 | length 210
  Top Layer w10: R33.2@1692.91,3880.2 1692.91,3962.91 1734.65,4004.65 P9.1@1802.91,4004.65
C_IN1P_4: P13.1 R49.2 | length 216.1
  Top Layer w10: R49.2@177.17,3880.2 177.17,3947.17 234.65,4004.65 P13.1@302.51,4004.65
C_IN2N_1: P1.4 R4.2 | length 260.6
  Top Layer w10: R4.2@2752.56,885.83 2783.39,855 2930.66,855 P1.4@2980,904.34
C_IN2N_2: P5.4 R20.2 | length 271.8
  Top Layer w10: R20.2@2752.56,2303.15 2821.85,2303.15 2865,2260 2934.56,2260 P5.4@2985.39,2310.83
C_IN2N_3: P9.4 R36.2 | length 277.1
  Top Layer w10: R36.2@1870.08,3880.2 1870.08,3890.08 1950,3970 1950,4057.55 P9.4@1902.91,4104.65
C_IN2N_4: P13.4 R52.2 | length 283.7
  Top Layer w10: R52.2@354.33,3880.2 450,3975.87 450,4057.16 P13.4@402.51,4104.65
C_IN2P_1: P1.3 R3.2 | length 144.2
  Top Layer w10: R3.2@2752.56,944.88 2793.1,904.34 P1.3@2880,904.34
C_IN2P_2: P5.3 R19.2 | length 154.1
  Top Layer w10: R19.2@2752.56,2362.2 2777.8,2362.2 2810,2330 2866.23,2330 P5.3@2885.39,2310.83
C_IN2P_3: P9.3 R35.2 | length 183
  Top Layer w10: R35.2@1811.02,3880.2 1811.02,3906.02 1830,3925 1865,3925 1902.91,3962.91 P9.3@1902.91,4004.65
C_IN2P_4: P13.3 R51.2 | length 201.1
  Top Layer w10: R51.2@295.28,3880.2 295.28,3910.28 315,3930 370,3930 402.51,3962.51 P13.3@402.51,4004.65
C_IN3N_1: P1.6 R6.2 | length 253.1
  Top Layer w10: R6.2@2752.56,767.72 2765.28,755 2930.66,755 P1.6@2980,804.34
C_IN3N_2: P5.6 R22.2 | length 264.3
  Top Layer w10: R22.2@2752.56,2185.04 2814.96,2185.04 2840,2160 2934.56,2160 P5.6@2985.39,2210.83
C_IN3N_3: P9.6 R38.2 | length 273.7
  Top Layer w10: R38.2@1988.19,3880.2 1988.19,3918.19 2055,3985 2055,4052.55 P9.6@2002.91,4104.65
C_IN3N_4: P13.6 R54.2 | length 276.2
  Top Layer w10: R54.2@472.44,3880.2 472.44,3892.44 550,3970 550,4057.16 P13.6@502.51,4104.65
C_IN3P_1: P1.5 R5.2 | length 136.7
  Top Layer w10: R5.2@2752.56,826.77 2774.99,804.34 P1.5@2880,804.34
C_IN3P_2: P5.5 R21.2 | length 146.6
  Top Layer w10: R21.2@2752.56,2244.09 2852.13,2244.09 P5.5@2885.39,2210.83
C_IN3P_3: P9.5 R37.2 | length 155
  Top Layer w10: R37.2@1929.13,3880.2 1929.13,3904.13 2002.91,3977.91 P9.5@2002.91,4004.65
C_IN3P_4: P13.5 R53.2 | length 161.4
  Top Layer w10: R53.2@413.39,3880.2 413.39,3888.39 502.51,3977.51 P13.5@502.51,4004.65
C_IN4N_1: P1.8 R8.2 | length 250.1
  Top Layer w10: R8.2@2752.56,649.61 2925.27,649.61 P1.8@2980,704.34
C_IN4N_2: P5.8 R24.2 | length 251
  Top Layer w10: R24.2@2752.56,2066.93 2941.49,2066.93 P5.8@2985.39,2110.83
C_IN4N_3: P9.8 R40.2 | length 262.1
  Top Layer w10: P9.8@2102.91,4104.65 2150,4057.55 2150,3965 2106.3,3921.3 R40.2@2106.3,3880.2
C_IN4N_4: P13.8 R56.2 | length 268.7
  Top Layer w10: R56.2@590.55,3880.2 590.55,3910.55 650,3970 650,4057.16 P13.8@602.51,4104.65
C_IN4P_1: P1.7 R7.2 | length 123.1
  Top Layer w10: R7.2@2752.56,708.66 P1.7@2875.68,708.66
C_IN4P_2: P5.7 R23.2 | length 139.1
  Top Layer w10: R23.2@2752.56,2125.98 2870.24,2125.98 P5.7@2885.39,2110.83
C_IN4P_3: P9.7 R39.2 | length 147.5
  Top Layer w10: R39.2@2047.24,3880.2 2047.24,3948.98 P9.7@2102.91,4004.65
C_IN4P_4: P13.7 R55.2 | length 153.9
  Top Layer w10: R55.2@531.5,3880.2 531.5,3901.5 602.51,3972.51 P13.7@602.51,4004.65
C_IN5N_1: P1.10 R10.2 | length 257.6
  Top Layer w10: R10.2@2752.56,531.5 2773.31,531.5 2796.81,555 2915,555 2964.34,604.34 P1.10@2980,604.34
C_IN5N_2: P5.10 R26.2 | length 258.5
  Top Layer w10: R26.2@2752.56,1948.82 2763.74,1960 2934.56,1960 P5.10@2985.39,2010.83
C_IN5N_3: P9.10 R42.2 | length 254.6
  Top Layer w10: P9.10@2202.91,4104.65 2250,4057.55 2250,3970 2224.41,3944.41 R42.2@2224.41,3880.2
C_IN5N_4: P13.10 R58.2 | length 261.2
  Top Layer w10: P13.10@702.51,4104.65 750,4057.16 750,3970 708.66,3928.66 R58.2@708.66,3880.2
C_IN5P_1: P1.9 R9.2 | length 113.7
  Top Layer w10: R9.2@2752.56,590.55 P1.9@2866.21,590.55
C_IN5P_2: P5.9 R25.2 | length 134.1
  Top Layer w10: R25.2@2752.56,2007.87 2882.43,2007.87 P5.9@2885.39,2010.83
C_IN5P_3: P9.9 R41.2 | length 140
  Top Layer w10: R41.2@2165.35,3880.2 2165.35,3967.09 P9.9@2202.91,4004.65
C_IN5P_4: P13.9 R57.2 | length 146.4
  Top Layer w10: R57.2@649.61,3880.2 649.61,3909.61 702.51,3962.51 P13.9@702.51,4004.65
C_IN6N_1: P1.12 R12.2 | length 265.1
  Top Layer w10: R12.2@2752.56,413.39 2818.39,413.39 2860,455 2930.66,455 P1.12@2980,504.34
C_IN6N_2: P5.12 R28.2 | length 266
  Top Layer w10: R28.2@2752.56,1830.71 2815.71,1830.71 2845,1860 2934.56,1860 P5.12@2985.39,1910.83
C_IN6N_3: P9.12 R44.2 | length 247.1
  Top Layer w10: P9.12@2302.91,4104.65 2350,4057.55 2350,3887.68 R44.2@2342.52,3880.2
C_IN6N_4: P13.12 R60.2 | length 253.7
  Top Layer w10: P13.12@802.51,4104.65 850,4057.16 850,3965 826.77,3941.77 R60.2@826.77,3880.2
C_IN6P_1: P1.11 R11.2 | length 140.7
  Top Layer w10: R11.2@2752.56,472.44 2848.1,472.44 P1.11@2880,504.34
C_IN6P_2: P5.11 R27.2 | length 141.6
  Top Layer w10: R27.2@2752.56,1889.76 2864.32,1889.76 P5.11@2885.39,1910.83
C_IN6P_3: P9.11 R43.2 | length 132.5
  Top Layer w10: R43.2@2283.46,3880.2 2283.46,3985.2 P9.11@2302.91,4004.65
C_IN6P_4: P13.11 R59.2 | length 138.9
  Top Layer w10: R59.2@767.72,3880.2 767.72,3969.85 P13.11@802.51,4004.65
C_IN7N_1: P1.14 R14.2 | length 272.6
  Top Layer w10: R14.2@2752.56,295.28 2776.62,319.34 2829.34,319.34 2865,355 2930.66,355 P1.14@2980,404.34
C_IN7N_2: P5.14 R30.2 | length 273.5
  Top Layer w10: R30.2@2752.56,1712.6 2822.6,1712.6 2875,1765 2939.56,1765 P5.14@2985.39,1810.83
C_IN7N_3: P9.14 R46.2 | length 248.4
  Top Layer w10: P9.14@2402.91,4104.65 2450,4057.55 2450,3890.83 R46.2@2460.63,3880.2
C_IN7N_4: P13.14 R62.2 | length 250.4
  Top Layer w10: P13.14@902.51,4104.65 955,4052.16 955,3890.32 R62.2@944.88,3880.2
C_IN7P_1: P1.13 R13.2 | length 148.2
  Top Layer w10: R13.2@2752.56,354.33 2829.99,354.33 P1.13@2880,404.34
C_IN7P_2: P5.13 R29.2 | length 149.1
  Top Layer w10: R29.2@2752.56,1771.65 2846.21,1771.65 P5.13@2885.39,1810.83
C_IN7P_3: P9.13 R45.2 | length 125
  Top Layer w10: R45.2@2401.57,3880.2 2401.57,4003.31 P9.13@2402.91,4004.65
C_IN7P_4: P13.13 R61.2 | length 131.4
  Top Layer w10: R61.2@885.83,3880.2 885.83,3987.96 P13.13@902.51,4004.65
C_IN8N_1: P1.16 R16.2 | length 280.1
  Top Layer w10: R16.2@2752.56,177.17 2757.56,182.17 2857.83,182.17 P1.16@2980,304.34
C_IN8N_2: P5.16 R32.2 | length 281
  Top Layer w10: R32.2@2752.56,1594.49 2869.05,1594.49 P5.16@2985.39,1710.83
C_IN8N_3: P9.16 R48.2 | length 255.9
  Top Layer w10: P9.16@2502.91,4104.65 2578.74,4028.81 R48.2@2578.74,3880.2
C_IN8N_4: P13.16 R64.2 | length 249.5
  Top Layer w10: P13.16@1002.51,4104.65 1062.99,4044.17 R64.2@1062.99,3880.2
C_IN8P_1: P1.15 R15.2 | length 155.7
  Top Layer w10: R15.2@2752.56,236.22 2811.88,236.22 P1.15@2880,304.34
C_IN8P_2: P5.15 R31.2 | length 156.6
  Top Layer w10: R31.2@2752.56,1653.54 2828.1,1653.54 P5.15@2885.39,1710.83
C_IN8P_3: P9.15 R47.2 | length 131.4
  Top Layer w10: P9.15@2502.91,4004.65 2519.68,3987.87 R47.2@2519.68,3880.2
C_IN8P_4: P13.15 R63.2 | length 125
  Top Layer w10: P13.15@1002.51,4004.65 1003.94,4003.22 R63.2@1003.94,3880.2
GND: C1.1 C2.2 C3.1 C4.2 C5.1 C6.2 C7.1 C8.2 C9.1 C10.2 C11.1 C12.2 C13.1 C14.2 C15.1 C16.2 C17.2 C18.1 C19.2 C20.1 C21.1 C22.1 C23.2 C24.1 C25.2 C26.1 C27.2 C28.1 C29.2 C30.1 C31.2 C32.1 C33.2 C34.1 C35.2 C36.1 C37.2 C38.2 C39.1 C40.2 C41.1 C42.1 C43.1 C44.2 C45.1 C46.2 C47.1 C48.2 C49.1 C50.2 C51.1 C52.2 C53.1 C54.2 C55.1 C56.2 C57.1 C58.2 C59.2 C60.1 C61.2 C62.1 C63.1 C64.1 C65.2 C66.1 C67.2 C68.1 C69.2 C70.1 C71.2 C72.1 C73.2 C74.1 C75.2 C76.1 C77.2 C78.1 C79.2 C80.2 C81.1 C82.2 C83.1 C84.1 C100.1 C101.1 C102.2 C300.2 LED1.2 LED2.2 P100.4 P100.6 P100.8 P100.10 P100.11 P100.12 P100.14 P100.16 P100.18 P100.20 P102.4 U1.18 U1.33 U1.43 U1.52 U1.60 U1.75 U2.3 U2.9 U2.11 U3.20 U3.23 U3.32 U3.33 U3.49 U3.51 U3.53 U3.57 U3.58 U4.20 U4.23 U4.32 U4.33 U4.49 U4.51 U4.53 U4.57 U4.58 U5.20 U5.23 U5.32 U5.33 U5.49 U5.51 U5.53 U5.57 U5.58 U6.20 U6.23 U6.32 U6.33 U6.49 U6.51 U6.53 U6.57 U6.58 XTAL1.2 XTAL1.4 | length 4644.8
  Top Layer w10: U6.23@444.61,3197.17 392.83,3197.17 v2(365,3225) 396.22,3256.22 U6.20@444.61,3256.22 ; U1.33@824.13,1014.21 875.79,1014.21 v2(910,980) 970,980 1013.11,936.89 U1.43@1013.11,884.29 ; U1.18@824.13,1309.49 v2(920,1309.49) ; U6.49@895.39,3020 840,3020 820,3040 v1(820,3059.37) ; U6.51@895.39,3059.37 v1(820,3059.37) ; U6.53@895.39,3098.74 838.74,3098.74 820,3080 v1(820,3059.37) ; U6.57@895.39,3177.48 957.48,3177.48 970,3190 v1(970,3210) 957.17,3197.17 U6.58@895.39,3197.17 ; U2.9@1119.49,455.31 1157.87,455.31 v3(1177.56,475) U2.3@1235.63,475 ; U1.52@1190.28,884.29 v2(1190.28,980) ; U1.60@1347.76,884.29 v2(1347.76,980) ; v2(1560,994.53) U1.75@1654.84,994.53 ; U5.23@1945,3197.17 1897.83,3197.17 v2(1870,3225) 1870,3250 1876.22,3256.22 U5.20@1945,3256.22 ; U3.49@2017.36,411.46 2017.36,452.36 v2(2055,490) v2@2056.73,488.27 ; U4.49@2022.76,1817.95 2022.76,1857.76 v2(2060,1895) v2@2062.13,1892.87 ; U3.51@2056.73,411.46 v2@2056.73,488.27 ; U4.51@2062.13,1817.95 v2@2062.13,1892.87 ; U3.53@2096.1,411.46 2096.1,448.9 v2@2056.73,488.27 ; U4.53@2101.5,1817.95 2101.5,1853.5 v2@2062.13,1892.87 ; U3.57@2174.84,411.46 2174.84,350.16 v2(2185,340) 2194.53,349.53 U3.58@2194.53,411.46 ; U4.57@2180.24,1817.95 2180.24,1749.76 v2(2190,1740) 2199.92,1749.92 U4.58@2199.92,1817.95 ; U3.23@2194.53,862.24 2194.53,894.53 2210,910 2225,910 v2(2250,935) 2253.58,931.42 U3.20@2253.58,862.24 ; U4.23@2199.92,2268.74 2199.92,2304.92 v2(2240,2345) 2258.98,2326.02 U4.20@2258.98,2268.74 ; v2@2310.63,3059.37 U5.51@2395.79,3059.37 ; U5.49@2395.79,3020 2320,3020 2310,3030 v2(2310,3060) 2310,3090 2318.74,3098.74 U5.53@2395.79,3098.74 ; U5.57@2395.79,3177.48 2467.48,3177.48 v2(2475,3185) 2462.83,3197.17 U5.58@2395.79,3197.17
  Top Layer w12: v2(420,855) 424.44,859.44 477.13,859.44 XTAL1.2@477.13,973.4 ; U6.32@444.61,3020 v2(444.61,2942.24) U6.33@522.36,2942.24 ; XTAL1.4@551.13,1064.4 537.56,1077.97 C102.2@537.56,1200 v2(610,1200) ; U3.33@1939.61,784.49 v2(1939.61,862.24) U3.32@2017.36,862.24 ; U4.33@1945,2190.98 v2(1945,2270) U4.32@2021.5,2270 ; U5.32@1945,3020 v2(1945,2942.24) U5.33@2022.76,2942.24
  Top Layer w20: LED2.2@1277.44,2014.88 v2(1277.44,2095)
  Top Layer w25: C300.2@609.13,1490.98 609.13,1415.87 v2(610,1415) ; v2(1087.56,600) C100.1@1150,600 ; LED1.2@1150.12,115 v2(1262.56,115)
  other v1: 2587.44,177.17 1900,222.44 2000,222.44 2587.44,236.22 2587.44,295.28 2587.44,354.33 2587.44,413.39 2587.44,472.44 2587.44,531.5 2587.44,590.55 2587.44,649.61 2587.44,708.66 2587.44,767.72 2587.44,826.77 2587.44,885.83 2587.44,944.88 1950,1002.56 2050,1002.56 2130,1002.56 2587.44,1003.94 2587.44,1062.99 2587.44,1594.49 2090,1597.44 2185,1597.44 2587.44,1653.54 2587.44,1712.6 2587.44,1771.65 2587.44,1830.71 2587.44,1889.76 2587.44,1948.82 2587.44,2007.87 2587.44,2066.93 2587.44,2125.98 2587.44,2185.04 2587.44,2244.09 2587.44,2303.15 2587.44,2362.2 2587.44,2421.26 1925,2427.56 2025,2427.56 2115,2427.56 2587.44,2480.32 1747.44,2800 252.44,2805 1747.44,2873.74 252.44,2875 252.44,2950 1747.44,2950 1180.88,3045 2657.56,3045 1180.88,3138.11 2657.56,3138.11 177.17,3717.44 236.22,3717.44 295.28,3717.44 354.33,3717.44 413.39,3717.44 472.44,3717.44 531.5,3717.44 590.55,3717.44 649.61,3717.44 708.66,3717.44 767.72,3717.44 826.77,3717.44 885.83,3717.44 944.88,3717.44 1003.94,3717.44 1062.99,3717.44 1692.91,3717.44 1751.97,3717.44 1811.02,3717.44 1870.08,3717.44 1929.13,3717.44 1988.19,3717.44 2047.24,3717.44 2106.3,3717.44 2165.35,3717.44 2224.41,3717.44 2283.46,3717.44 2342.52,3717.44 2401.57,3717.44 2460.63,3717.44 2519.68,3717.44 2578.74,3717.44
  other v3: 1157.87,445.47 1197.24,445.47 1157.87,504.53 1197.24,504.53
IN1N_1: C2.1 R2.1 U3.15 | length 510.9
  Top Layer w10: U3.15@2390.39,764.8 2429.8,764.8 2435,770 2435,905 v1(2530,1000) ; v1(2642.56,1003.94) R2.1@2697.44,1003.94
  Upper Signal Layer w10: v1(2530,1000) 2565,1035 2611.5,1035 v1(2642.56,1003.94)
IN1N_2: C23.1 R18.1 U4.15 | length 521.8
  Top Layer w10: U4.15@2395.79,2171.3 2431.41,2171.3 2445,2184.89 2445,2336.26 v1(2530,2421.26) ; v1(2642.56,2421.26) R18.1@2697.44,2421.26
  Upper Signal Layer w10: v1(2530,2421.26) 2563.74,2455 2608.82,2455 v1(2642.56,2421.26)
IN1N_3: C44.1 R34.1 U5.15 | length 630.4
  Top Layer w10: v1(1750,3665) 1755,3660 1755,3625 1930,3450 2025,3450 2042.44,3432.56 U5.15@2042.44,3393.03 ; v1(1751.97,3772.56) R34.1@1751.97,3825.08
  Upper Signal Layer w10: v1(1750,3665) 1725,3690 1725,3745.59 v1(1751.97,3772.56)
IN1N_4: C65.1 R50.1 U6.15 | length 731
  Top Layer w10: v1(236.22,3665) 236.22,3503.78 265,3475 515,3475 542.05,3447.95 U6.15@542.05,3393.03 ; v1(236.22,3772.56) R50.1@236.22,3825.08
  Upper Signal Layer w10: v1(236.22,3665) 205,3696.22 205,3741.34 v1(236.22,3772.56)
IN1P_1: C1.2 R1.1 U3.16 | length 530.3
  Top Layer w10: U3.16@2390.39,784.49 2390.39,923.39 v1(2530,1062.99) ; v1(2642.56,1062.99) R1.1@2697.44,1062.99
  Upper Signal Layer w10: v1(2530,1062.99) 2562.01,1095 2610.55,1095 v1(2642.56,1062.99)
IN1P_2: C22.2 R17.1 U4.16 | length 540.9
  Top Layer w10: U4.16@2395.79,2190.98 2395.79,2345.79 v1(2530,2480) ; v1(2642.56,2480.32) R17.1@2697.44,2480.32
  Upper Signal Layer w10: v1(2530,2480) 2565,2515 2607.87,2515 v1(2642.56,2480.32)
IN1P_3: C43.2 R33.1 U5.16 | length 639.8
  Top Layer w10: v1(1690,3665) 1961.97,3393.03 U5.16@2022.76,3393.03 ; v1(1692.91,3772.56) R33.1@1692.91,3825.08
  Upper Signal Layer w10: v1(1690,3665) 1650,3705 1650,3729.65 v1(1692.91,3772.56)
IN1P_4: C64.2 R49.1 U6.16 | length 755.2
  Top Layer w10: v1(177.17,3665) 177.17,3522.83 250,3450 505,3450 522.36,3432.64 U6.16@522.36,3393.03 ; v1(177.17,3772.56) R49.1@177.17,3825.08
  Upper Signal Layer w10: v1(177.17,3665) 140,3702.17 140,3735.39 v1(177.17,3772.56)
IN2N_1: C4.1 R4.1 U3.13 | length 439.1
  Top Layer w10: U3.13@2390.39,725.43 2440.43,725.43 2465,750 2465,820.83 v1(2530,885.83) ; v1(2642.56,885.83) R4.1@2697.44,885.83
  Upper Signal Layer w10: v1(2530,885.83) 2559.17,915 2613.39,915 v1(2642.56,885.83)
IN2N_2: C25.1 R20.1 U4.13 | length 443.3
  Top Layer w10: U4.13@2395.79,2131.93 2434.46,2131.93 2480,2177.47 2480,2253.15 v1(2530,2303.15) ; v1(2642.56,2303.15) R20.1@2697.44,2303.15
  Upper Signal Layer w10: v1(2530,2303.15) 2561.85,2335 2610.71,2335 v1(2642.56,2303.15)
IN2N_3: C46.1 R36.1 U5.13 | length 588.6
  Top Layer w10: v1(1870.08,3665) 1870.08,3594.92 1975,3490 2050,3490 2081.81,3458.19 U5.13@2081.81,3393.03 ; v1(1870.08,3772.56) R36.1@1870.08,3825.08
  Upper Signal Layer w10: v1(1870.08,3665) 1840,3695.08 1840,3742.48 v1(1870.08,3772.56)
IN2N_4: C67.1 R52.1 U6.13 | length 638.3
  Top Layer w10: v1(354.33,3665) 354.33,3550.67 380,3525 530,3525 581.42,3473.58 U6.13@581.42,3393.03 ; v1(354.33,3772.56) R52.1@354.33,3825.08
  Upper Signal Layer w10: v1(354.33,3665) 325,3694.33 325,3743.23 v1(354.33,3772.56)
IN2P_1: C3.2 R3.1 U3.14 | length 476.3
  Top Layer w10: U3.14@2390.39,745.12 2435.12,745.12 2450,760 2450,865 v1(2530,945) ; v1(2642.56,944.88) R3.1@2697.44,944.88
  Upper Signal Layer w10: v1(2530,945) 2560,975 2612.44,975 v1(2642.56,944.88)